# Altium PCB tpa.PcbDoc
Units mm, origin at the board's own origin, x right, y up, seen from the top; angles counter-clockwise.
Board outline 152.4 x 101.6 mm, 2 copper layers (Top Layer, Bottom Layer); 7 components, 8 nets, 26 pads, 0 vias.
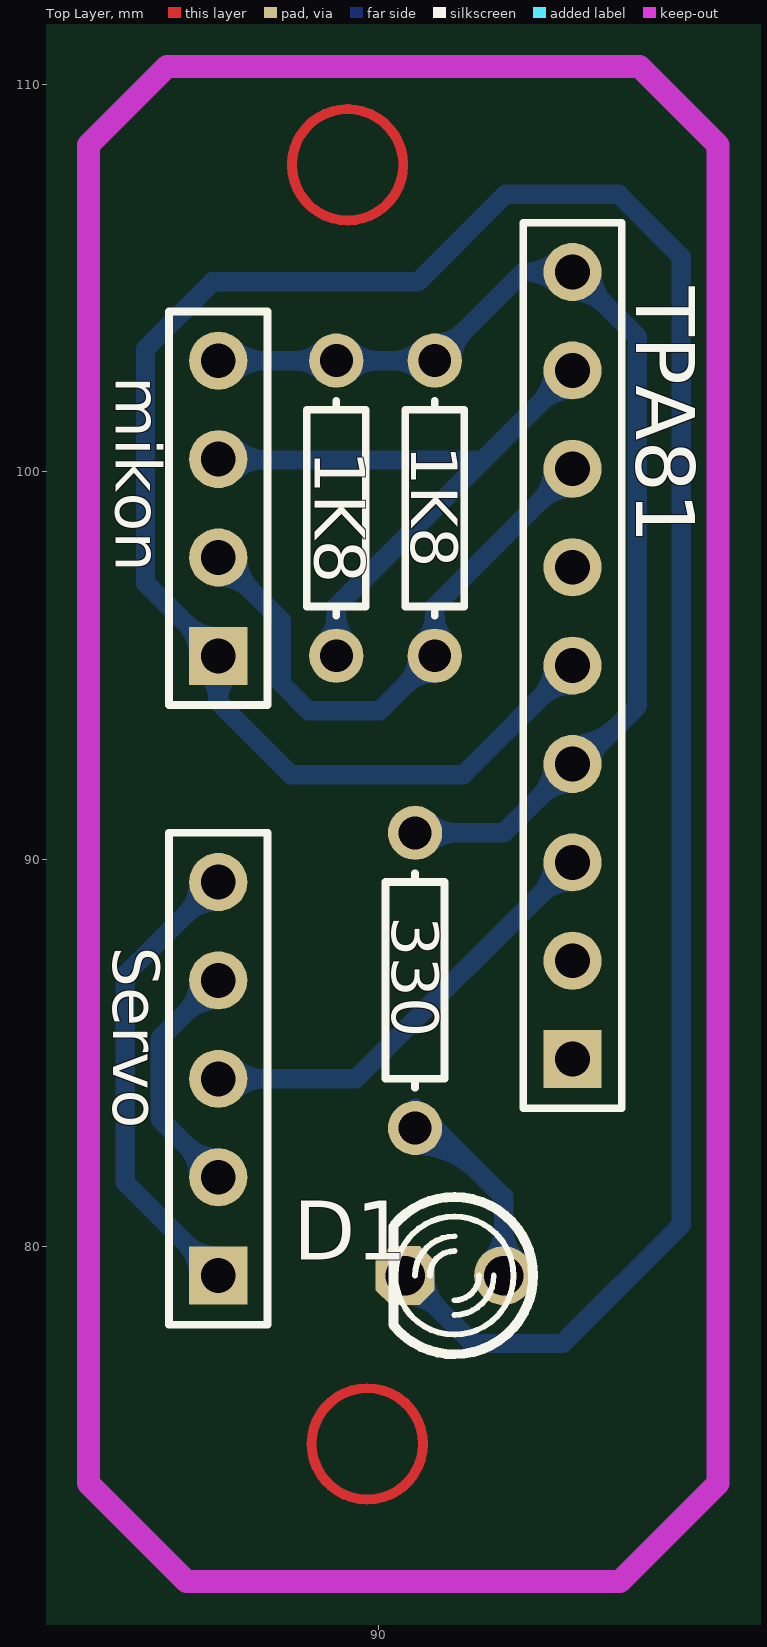
[diagram p0: Top Layer view]
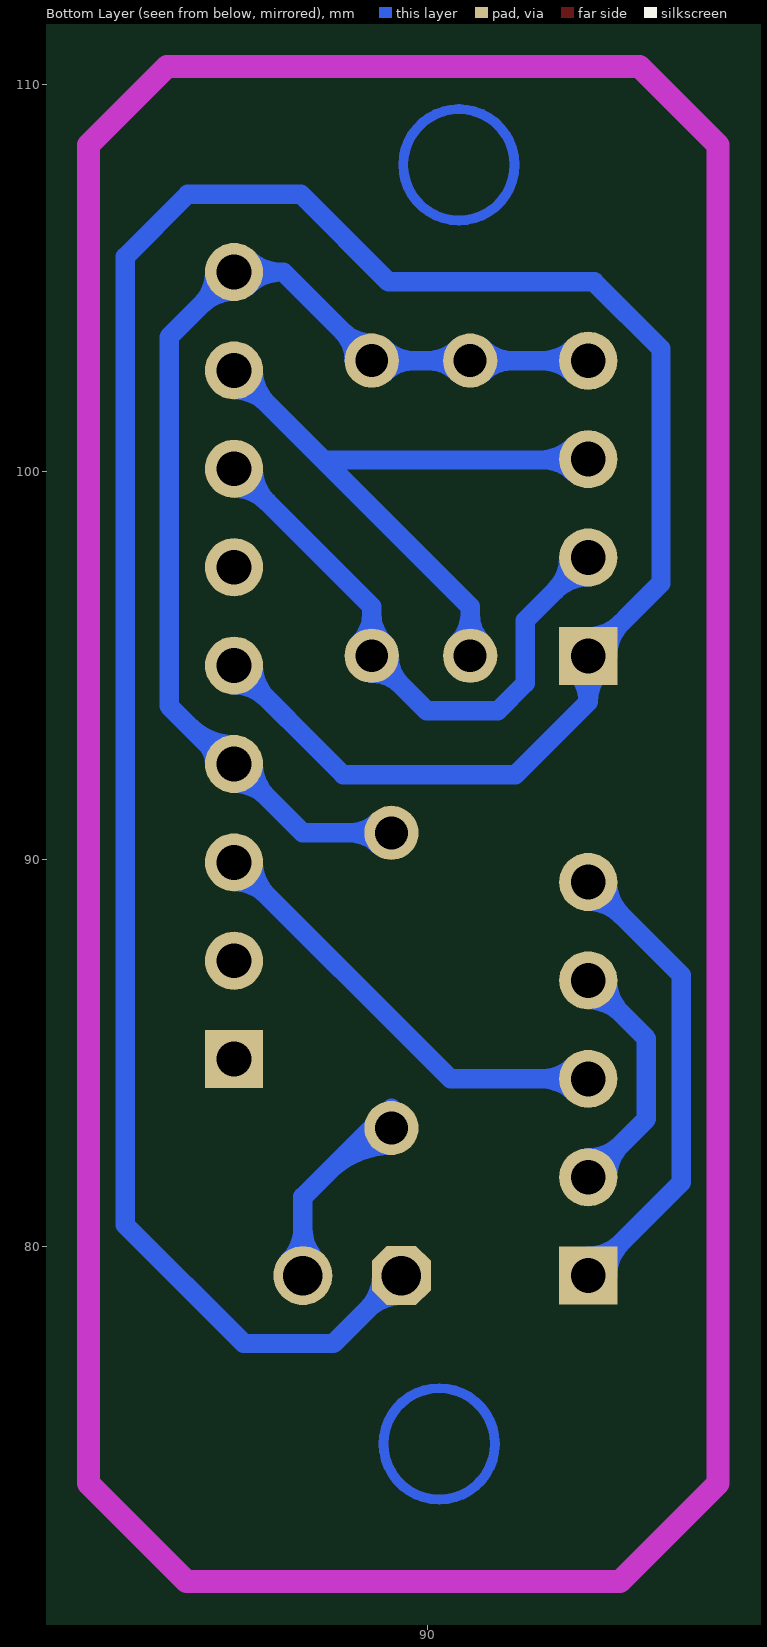
[diagram p1: Bottom Layer view, seen from below]

## Layer stack, top to bottom
Top Layer: signal copper 0.0356
Dielectric: dielectric 0.32, FR-4, Dk 4.8
Bottom Layer: signal copper 0.0356

## Board outline
25.4,25.4 177.8,25.4 177.8,127 25.4,127

## Design rules (kind name [scope] priority, off if disabled: settings)
Clearance [All] p1: gap=0.4
PolygonConnect [All] p1: connectstyle=Relief reliefconductorwidth=0.254 reliefentries=4 polygonreliefangle="90 Angle"
RoutingVias [All] p1: holewidth=0.711 width=1.27 viastyle="Through Hole" minholewidth=0.711 minwidth=1.27 maxholewidth=0.711 maxwidth=1.27
SilkscreenOverComponentPads [All] p1: minsilkscreentomaskgap=0.254
SolderMaskExpansion [All] p1: expansion=0.102
Width [All] p1: maxlimit=0.6 minlimit=0.3 preferedwidth=0.3 minimp=50.000000 maximp=50.000000 favimp=50.000000
27 further rules are at their usual default settings.

## Components (designator, comment, footprint, x,y, rotation, side; value= is the part's Value field where it differs from the comment)
1K8 "Res1" AXIAL-0.3 88.9,99.06 r90 top (schematic designator 10K)
1K8 "Res1" AXIAL-0.3 91.44,99.06 r90 top (schematic designator 10K,)
330 "Res1" AXIAL-0.3 90.932,86.868 r90 top
D1 "LED" My_LED3MM 91.948,79.248 r180 top
mikon "Header 4" HDR1X4 85.852,95.246 r90 top
Servo "Header 5" HDR1X5 85.852,79.248 r90 top
TPA81 "Header 9" HDR1X9 94.996,84.836 r90 top

## Footprints (in the part's own frame and the unit in brackets; to place one, negate y for a bottom-side part, rotate by r counter-clockwise, add the part's x,y. Pads: shape width x height; smd on the part's side, far side on the other; paste and mask are expansions set on the pad)
AXIAL-0.3 [mm] "Axial Device, Thru-Hole; 2 Leads; 0.3 in Pin Spacing"
  round 1.4 hole 0.85: 1(-3.81,0) 2(3.81,0)
  silkscreen extent -2.77,-0.76 2.77,0.76
HDR1X4 [mm] "Connector; Header; 4 Position"
  rect 1.5x1.5 hole 0.9: 1(0,0)
  round 1.5 hole 0.9: 2(2.54,0) 3(5.08,0) 4(7.62,0)
  silkscreen extent -1.27,-1.27 8.89,1.27
HDR1X5 [mm] "Connector; Header; 5 Position"
  rect 1.5x1.5 hole 0.9: 1(0,0)
  round 1.5 hole 0.9: 2(2.54,0) 3(5.08,0) 4(7.62,0) 5(10.16,0)
  silkscreen extent -1.27,-1.27 11.43,1.27
HDR1X9 [mm] "Connector; Header; 9 Position"
  rect 1.5x1.5 hole 0.9: 1(0,0)
  round 1.5 hole 0.9: 2(2.54,0) 3(5.08,0) 4(7.62,0) 5(10.16,0) 6(12.7,0) 7(15.24,0) 8(17.78,0) 9(20.32,0)
  silkscreen extent -1.27,-1.27 21.59,1.27
My_LED3MM [mil]
  round 60 hole 40: A(-50,0)
  oct 60x60 hole 40: K(50,0)
  silkscreen extent -80,-80 62,80

## Part data
1K8 1K8 330: "Resistor"
D1: "Typical INFRARED GaAs LED"
mikon: "Header, 4-Pin"
Servo: "Header, 5-Pin"
TPA81: "Header, 9-Pin"

## Nets (pads, with @x,y where several pads share a name; then routed paths per layer and width w, separated by ;. In a path a pad name is that pad's centre, name@x,y a point inside that pad or via, vN(x,y) a via of type N, cw(c..) or ccw(c..) an arc to the next point about the centre after c; other vN are vias at no path point)
GND: D1.K mikon.1 TPA81.5 | length 78.8
  Bottom Layer w0.5: mikon.1@85.352,95.246 ccw(c84.145,95.246) 84.998,96.1 ccw(c85.852,96.953) mikon.1@85.852,95.746 ; mikon.1@85.502,94.889 cw(c84.687,94.056) 85.852,94.056 ; mikon.1@86.202,94.889 ccw(c87.017,94.056) 85.852,94.056 ; D1.K@90.678,78.736 cw(c90.678,77.5) 91.552,78.374 cw(c92.426,79.248) D1.K@91.19,79.248 ; D1.K 92.431,77.495 94.742,77.495 97.805,80.559 97.805,105.547 96.19,107.163 93.269,107.163 91.008,104.902 85.7,104.902 83.972,103.175 83.972,97.126 mikon.1 85.852,94.056 ; TPA81.5@94.496,94.996 cw(c93.289,94.996) 94.142,94.142 cw(c94.996,93.289) TPA81.5@94.996,94.496 ; TPA81.5 92.177,92.177 87.732,92.177 85.852,94.056
GND1: Servo.1 Servo.5 | length 15.9
  Bottom Layer w0.5: Servo.1@85.352,79.248 ccw(c84.145,79.248) 84.998,80.102 ccw(c85.852,80.955) Servo.1@85.852,79.748 ; Servo.5@85.352,89.408 cw(c84.145,89.408) 84.998,88.554 cw(c85.852,87.701) Servo.5@85.852,88.908 ; Servo.1 83.449,81.651 83.449,87.005 Servo.5
Net10K,_1: 1K8.1@91.44,95.25 mikon.2 TPA81.7 | length 22.8
  Bottom Layer w0.5: mikon.2@85.852,97.286 cw(c85.852,96.079) 86.706,96.932 cw(c87.559,97.786) mikon.2@86.352,97.786 ; mikon.2@85.852,97.536 mikon.2@86.102,97.536 ; mikon.2 mikon.2@86.102,97.536 ; mikon.2@86.106,97.536 mikon.2@86.102,97.536 ; 1K8.1@90.99,95.25 cw(c89.904,95.25) 90.672,94.482 cw(c91.44,93.714) 1K8.1@91.44,94.8 ; 1K8.1@91.122,95.568 ccw(c90.354,96.336) 91.44,96.336 ccw(c92.526,96.336) 1K8.1@91.758,95.568 ; TPA81.7@94.496,100.076 cw(c93.289,100.076) 94.142,99.222 cw(c94.996,98.369) TPA81.7@94.996,99.576 ; TPA81.7@94.742,100.076 TPA81.7 91.44,96.52 91.44,95.25 90.018,93.828 88.189,93.828 87.478,94.539 87.478,96.16 mikon.2@86.102,97.536
Net10K_1: 1K8.1@88.9,95.25 mikon.3 TPA81.8 | length 22.6
  Bottom Layer w0.5: mikon.3 85.873,100.305 92.685,100.305 ; mikon.3@86.206,99.972 cw(c87.007,99.171) 87.007,100.305 ; mikon.3@86.206,100.68 ccw(c87.111,101.585) 87.111,100.305 ; 1K8.1@88.582,95.568 ccw(c87.814,96.336) 88.9,96.336 ccw(c89.986,96.336) 1K8.1@89.218,95.568 ; 1K8.1@88.9,95.25 88.9,96.52 92.685,100.305 ; TPA81.8@94.496,102.616 cw(c93.289,102.616) 94.142,101.762 cw(c94.996,100.909) TPA81.8@94.996,102.116 ; TPA81.8@94.742,102.87 TPA81.8 92.685,100.305
Net330_1: 330.1 D1.A | length 10.9
  Bottom Layer w0.5: 330.1@90.932,82.608 cw(c90.932,80.295) 92.567,81.931 ; 330.1@90.932,83.108 cw(c90.932,82.002) 91.714,82.784 ; 330.1@90.932,83.566 93.218,81.28 ; D1.A@92.856,79.61 ccw(c91.982,80.484) 93.218,80.484 ccw(c94.454,80.484) D1.A@93.58,79.61 ; D1.A 93.218,81.28 ; 93.218,80.264 93.218,81.28
NetServo_3: Servo.3 TPA81.3 | length 15.3
  Bottom Layer w0.5: Servo.3 89.408,84.328 TPA81.3 ; Servo.3@86.206,83.974 cw(c87.059,83.121) 87.059,84.328 cw(c87.059,85.535) Servo.3@86.206,84.682 ; TPA81.3@94.496,89.916 cw(c93.289,89.916) 94.142,89.062 cw(c94.996,88.209) TPA81.3@94.996,89.416
VCC: 1K8.2 330.2 mikon.4 TPA81.4 TPA81.9 | length 47.1
  Bottom Layer w0.5: mikon.4 85.856,102.87 88.9,102.87 91.44,102.87 93.726,105.156 TPA81.9 96.672,103.48 96.672,93.955 95.174,92.456 TPA81.4 93.218,90.678 330.2 ; mikon.4@86.206,102.512 cw(c87.069,101.649) 87.069,102.87 ; mikon.4@86.206,103.22 ccw(c87.049,104.063) 87.049,102.87 ; 1K8.2@88.582,102.552 ccw(c87.814,101.784) 87.814,102.87 ccw(c87.814,103.956) 1K8.2@88.582,103.188 ; 1K8.2@89.218,102.552 cw(c89.986,101.784) 89.986,102.87 cw(c89.986,103.956) 1K8.2@89.218,103.188 ; 1K8.2@91.122,102.552 ccw(c90.354,101.784) 90.354,102.87 ccw(c90.354,103.956) 1K8.2@91.122,103.188 ; 330.2@91.25,90.36 cw(c92.018,89.592) 92.018,90.678 cw(c92.018,91.764) 330.2@91.25,90.996 ; 1K8.2@91.44,103.32 ccw(c91.44,104.406) 92.208,103.638 ccw(c92.976,102.87) 1K8.2@91.89,102.87 ; TPA81.4@94.496,92.456 cw(c93.289,92.456) 94.142,91.602 cw(c94.996,90.749) TPA81.4@94.996,91.956 ; TPA81.9@94.642,104.802 ccw(c93.789,103.949) 93.789,105.156 ccw(c93.789,106.363) TPA81.9@94.642,105.51 ; TPA81.4@94.996,92.956 ccw(c94.996,94.592) 96.153,93.435 ; TPA81.9@94.996,104.656 cw(c94.996,103.449) 95.85,104.302 cw(c96.703,105.156) TPA81.9@95.496,105.156 ; TPA81.4@95.496,92.456 cw(c96.274,92.456) 95.724,93.006
VCC1: Servo.2 Servo.4 | length 10.1
  Bottom Layer w0.5: Servo.2@85.352,81.788 ccw(c84.145,81.788) 84.998,82.642 ccw(c85.852,83.495) Servo.2@85.852,82.288 ; Servo.4@85.352,86.868 cw(c84.145,86.868) 84.998,86.014 cw(c85.852,85.161) Servo.4@85.852,86.368 ; Servo.2 84.349,83.291 84.349,85.365 Servo.4
pads on no net: TPA81.1 TPA81.2 TPA81.6

## Keep-outs
Keep-Out Layer:
  lines w0.6: 82.499,73.889 82.499,108.433 84.531,110.465 96.723,110.465 98.755,108.433 98.755,73.889 96.215,71.349 85.039,71.349 82.499,73.889

## Other copper
Multi-Layer:
  circle w0.254: c89.19,107.925 r1.437
  circle w0.254: c89.698,74.905 r1.437